# Altium PCB ST-Link Stlink v2_03_66x34mm.PcbDoc
Units mm, origin at the board's own origin, x right, y up, seen from the top; angles counter-clockwise.
Board outline 66.07 x 29.13 mm, 2 copper layers (Top Layer, Bottom Layer); 37 components, 28 nets, 138 pads, 37 vias.
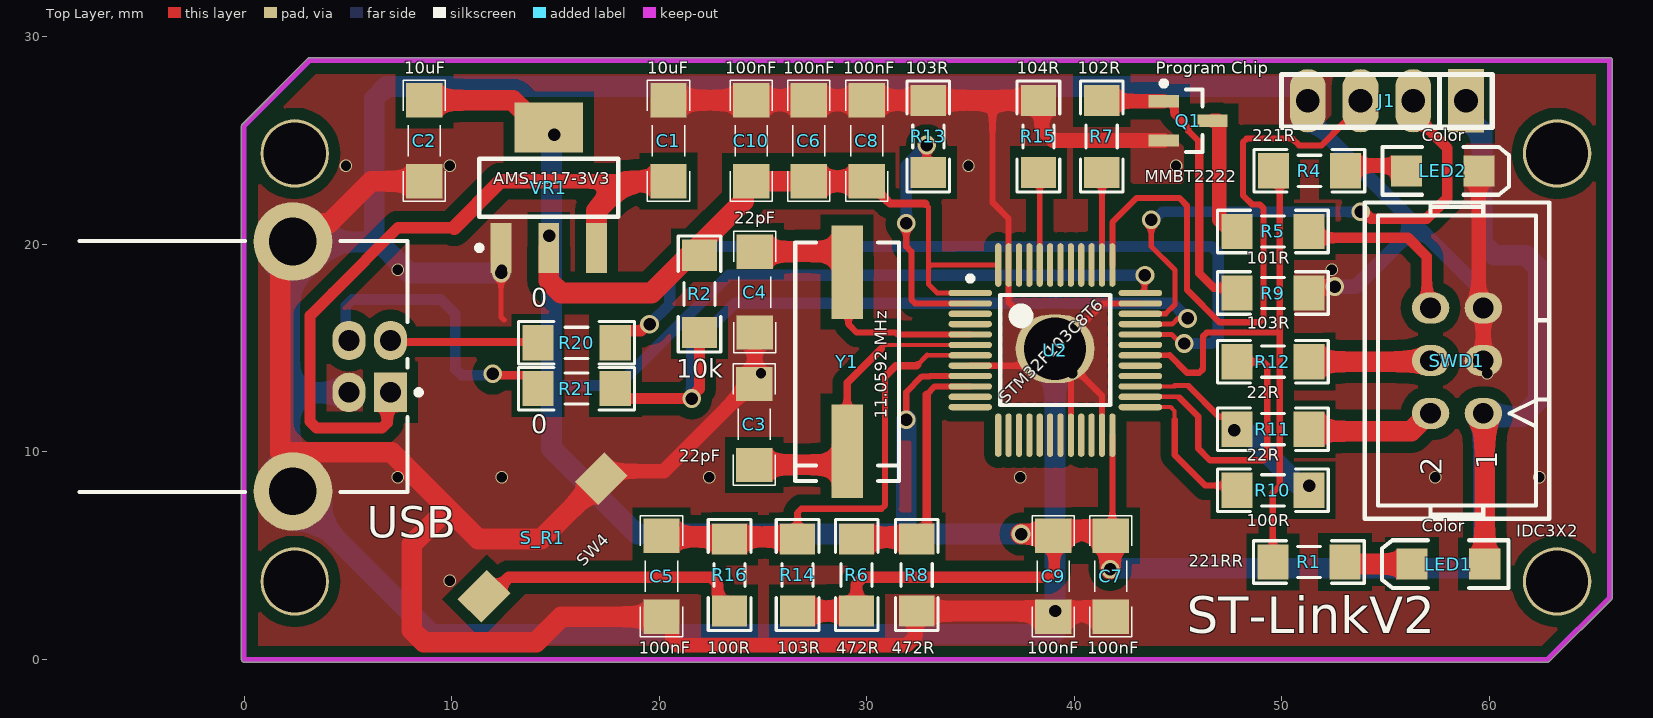
[diagram p0: Top Layer view]
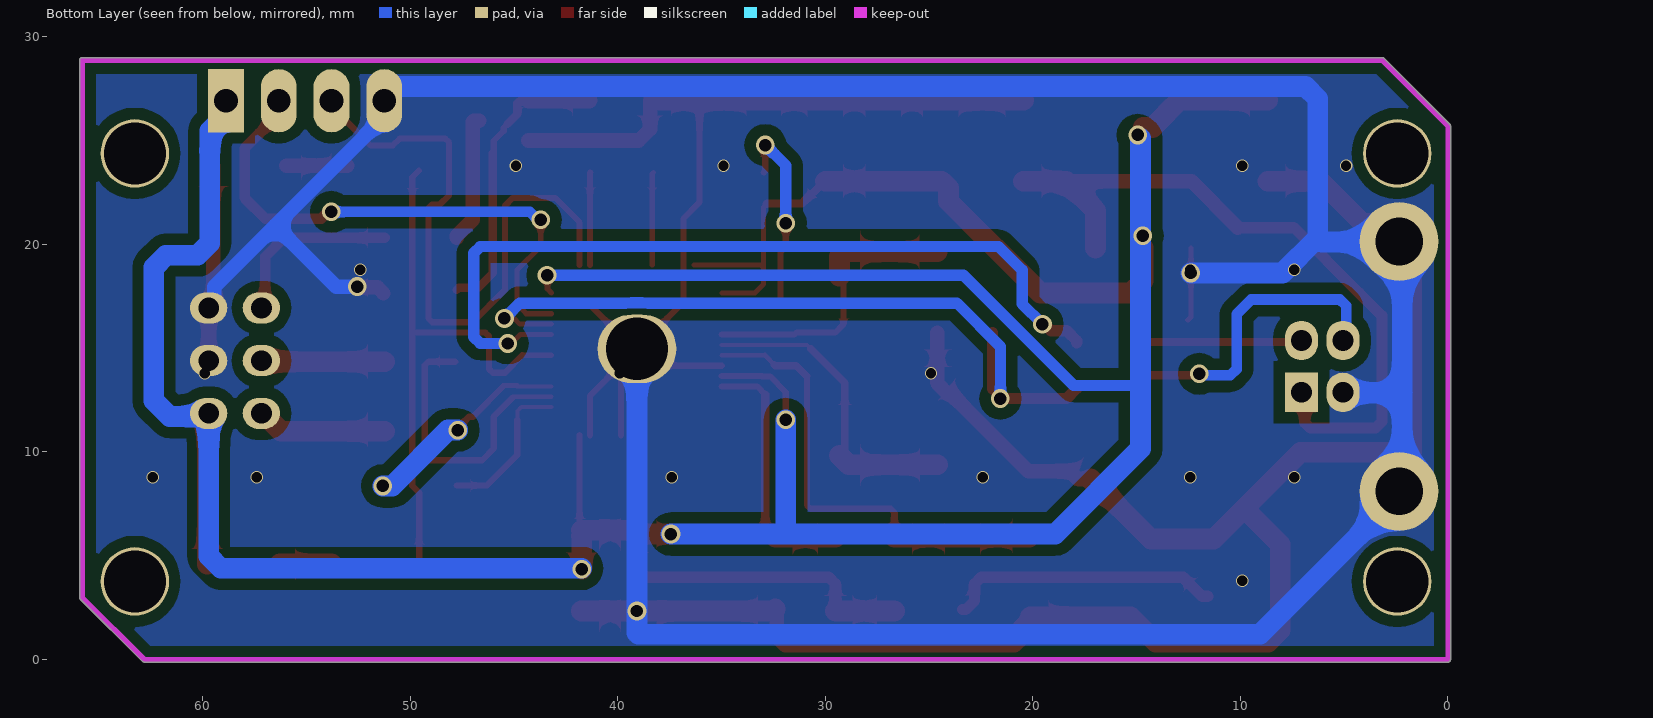
[diagram p1: Bottom Layer view, seen from below]
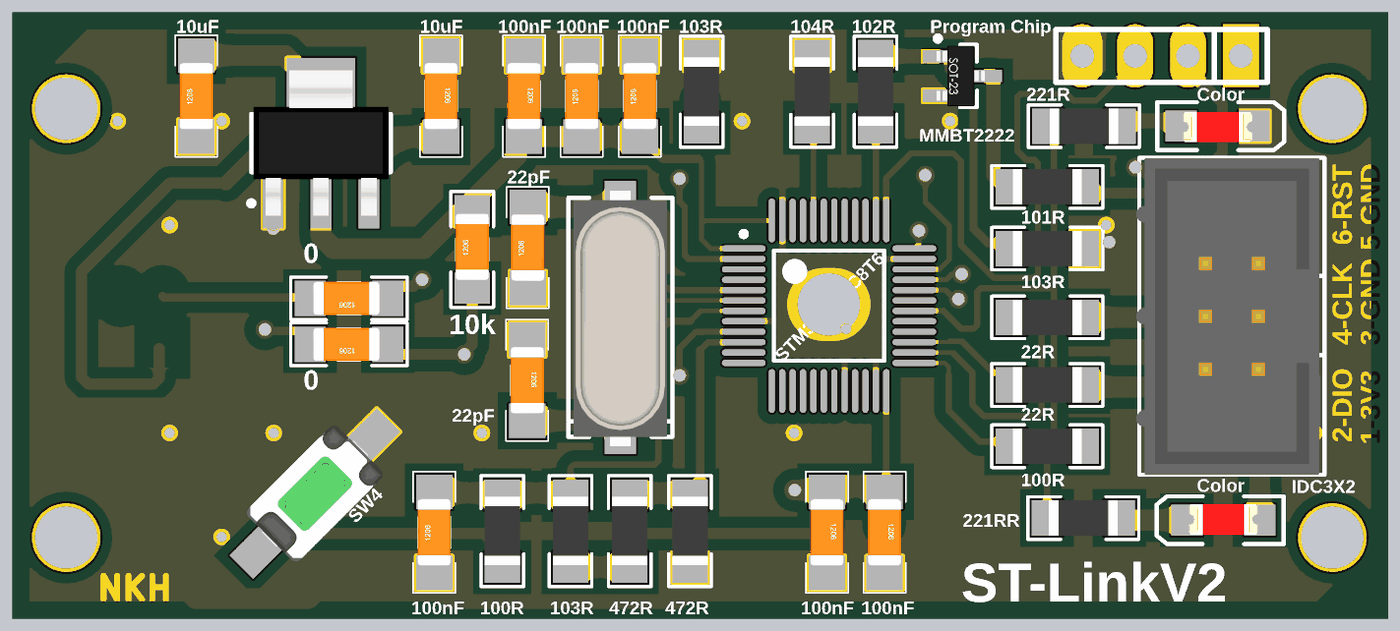
[diagram p2: 3D render of the assembled board from above, using the file's embedded part models]

## Layer stack, top to bottom
Top Solder: solder mask 0.0102, Solder Resist, Dk 3.5
Top Layer: signal copper 0.0356
Dielectric 1: dielectric 0.32, FR-4, Dk 4.8
Bottom Layer: signal copper 0.0356
Bottom Solder: solder mask 0.0102, Solder Resist, Dk 3.5

## Board outline
-0.127,0 -0.127,25.705 cw(c0,25.705) -0.09,25.795 3.085,28.97 3.084,28.969 cw(c3.175,28.88) 3.175,29.007 65.811,29.007 cw(c65.811,28.88) 65.939,28.88 65.939,2.997 cw(c65.811,2.997) 65.901,2.907 62.904,-0.09 62.905,-0.09 cw(c62.814,0) 62.814,-0.127 0,-0.127 cw(c0,0)

## Design rules (kind name [scope] priority, off if disabled: settings)
Clearance [All] p1: gap=0.54 ignorepadtopadclearanceinfootprint=FALSE except(0.2: Arc-Arc Arc-Track Arc-SMDPad Track-Track Track-SMDPad SMDPad-SMDPad SMDPad-THPad; 0.3: Arc-THPad Arc-Via Arc-Text Arc-Hole Track-THPad Track-Via Track-Text Track-Hole SMDPad-Via SMDPad-Text SMDPad-Hole THPad-THPad THPad-Via THPad-Text THPad-Hole Via-Via Via-Text Via-Hole; 0.7: Fill-Text Fill-Hole Poly-Text Poly-Hole Region-Text Region-Hole Text-Text Text-Hole)
PlaneConnect [All] p1: planeconnectstyle=Direct reliefexpansion=0.508 reliefentries=4 reliefconductorwidth=0.254 reliefairgap=0.254
PolygonConnect [All] p1: connectstyle=Direct reliefconductorwidth=0.254 reliefentries=4 polygonreliefangle="90 Angle" airgapwidth=0.254
RoutingVias [All] p1: holewidth=0.406 width=0.813 viastyle="Through Hole" minholewidth=0.406 minwidth=0.813 maxholewidth=0.406 maxwidth=0.813
SolderMaskExpansion [All] p1: expansion=0.102 istentingtop=FALSE
Width [All] p1: maxlimit=2.032 minlimit=0.025 preferedwidth=0.508
29 further rules are at their usual default settings.

## Components (designator, comment, footprint, x,y, rotation, side; value= is the part's Value field where it differs from the comment)
C1 "10uF" CAPC4817X12N 20.447,24.994 r270 top
C2 "10uF" CAPC4817X12N 8.687,24.994 r90 top
C3 "22pF" CAPC4817X12N 24.587,11.328 r270 top
C4 "22pF" CAPC4817X12N 24.613,17.704 r90 top
C5 "100nF" CAPC4817X12N 20.117,4.013 r90 top
C6 "100nF" CAPC4817X12N 27.203,24.994 r90 top
C7 "100nF" CAPC4817X12N 41.758,4.013 r270 top
C8 "100nF" CAPC4817X12N 29.997,24.994 r90 top
C9 "100nF" CAPC4817X12N 38.989,4.013 r270 top
C10 "100nF" CAPC4817X12N 24.435,24.994 r270 top
J1 "Program Chip" ZSIP04 58.877,26.924 r180 top
LED1 "Color" "LED SMD 1206" 58.034,4.597 r180 top
LED2 "Color" "LED SMD 1206" 57.76,23.546 r0 top
Q1 "MMBT2222" SOT23_BEC_M 45.491,25.959 r0 top
R1 "221RR" RES1206#1 51.308,4.699 r0 top
R2 "10k" RES1206#2 21.946,17.617 r270 top
R4 "221R" RES1206#1 51.333,23.546 r0 top
R5 "101R" RES1206#1 49.573,20.625 r0 top
R6 "472R" RES1206#1 29.515,4.072 r270 top
R7 "102R" RES1206#1 41.326,25.205 r90 top
R8 "472R" RES1206#1 32.41,4.072 r90 top
R9 "103R" RES1206#1 49.573,17.66 r180 top
R10 "100R" RES1206#1 49.573,8.153 r0 top
R11 "22R" RES1206#1 49.573,11.098 r0 top
R12 "22R" RES1206#1 49.573,14.351 r0 top
R13 "103R" RES1206#1 32.969,25.205 r90 top
R14 "103R" RES1206#1 26.67,4.072 r270 top
R15 "104R" RES1206#1 38.278,25.205 r270 top
R16 "100R" RES1206#1 23.393,4.072 r90 top
R20 "0" RES1206#2 16.026,15.262 r0 top value=0-ohm
R21 "0" RES1206#2 16.026,13.054 r0 top value=0-ohm
S_R1 "SW4" SMD_ALPS_NEW 14.389,5.875 r225 top
SWD1 "IDC3X2" IDC_2X3 58.445,14.402 r90 top
U2 "STM32F103C8T6" LQFP48_M 39.091,14.91 r0 top
USB "USB Connector" USB2.5-2H4F -7.95,14.122 r180 top
VR1 "AMS1117-3V3" MP04A_N 14.681,22.733 r90 top
Y1 "11.0592 MHz" "Crystal SMD" 29.062,14.351 r90 top

## Footprints (in the part's own frame and the unit in brackets; to place one, negate y for a bottom-side part, rotate by r counter-clockwise, add the part's x,y. Pads: shape width x height; smd on the part's side, far side on the other; paste and mask are expansions set on the pad)
CAPC4817X12N [mm]
  rect 1.65x1.75 smd: 1(-1.95,0) 2(1.95,0)
  silkscreen extent -2.92,-1.02 2.92,1.02, body extent -1.6,-0.8 1.6,0.8, height 1
"Crystal SMD" [mm]
  rect 4.5x1.5 smd: 1(-4.318,0) 2(4.318,0)
  silkscreen extent -5.75,-2.5 5.75,2.5, body extent -6.21,-2.25 6.09,2.25, height 5.18
IDC_2X3 [mm]
  oval 1.5x1.8 hole 1 mask+0.1: 1(-2.54,-1.27) 2(-2.54,1.27) 3(0,-1.27) 4(0,1.27) 5(2.54,-1.27) 6(2.54,1.27)
  silkscreen extent -7.62,-4.45 7.62,4.44, body extent -7.61,-4.25 7.61,4.6, height 9.17
"LED SMD 1206" [mm]
  rect 1.5x1.5 smd: 1(-1.75,0) 2(1.75,0)
  silkscreen extent -2.9,-1.15 3.2,1.15, body extent -1.65,-0.76 1.65,0.69, height 1.36
LQFP48_M [mm] "Thin QFP, 48-Leads, Body 7x7mm, Pitch 0.5mm, IPC Low Density"
  oval 2.1x0.3 smd: 1(-4.1,2.75) 2(-4.1,2.25) 3(-4.1,1.75) 4(-4.1,1.25) 5(-4.1,0.75) 6(-4.1,0.25) 7(-4.1,-0.25) 8(-4.1,-0.75) 9(-4.1,-1.25) 10(-4.1,-1.75) 11(-4.1,-2.25) 12(-4.1,-2.75) 25(4.1,-2.75) 26(4.1,-2.25) 27(4.1,-1.75) 28(4.1,-1.25) 29(4.1,-0.75) 30(4.1,-0.25) 31(4.1,0.25) 32(4.1,0.75) 33(4.1,1.25) 34(4.1,1.75) 35(4.1,2.25) 36(4.1,2.75)
  oval 0.3x2.1 smd: 13(-2.75,-4.1) 14(-2.25,-4.1) 15(-1.75,-4.1) 16(-1.25,-4.1) 17(-0.75,-4.1) 18(-0.25,-4.1) 19(0.25,-4.1) 20(0.75,-4.1) 21(1.25,-4.1) 22(1.75,-4.1) 23(2.25,-4.1) 24(2.75,-4.1) 37(2.75,4.1) 38(2.25,4.1) 39(1.75,4.1) 40(1.25,4.1) 41(0.75,4.1) 42(0.25,4.1) 43(-0.25,4.1) 44(-0.75,4.1) 45(-1.25,4.1) 46(-1.75,4.1) 47(-2.25,4.1) 48(-2.75,4.1)
  silkscreen extent -4.22,-2.65 2.65,3.57, body extent -3.5,-3.5 3.5,3.5, height 1.6
MP04A_N [mm] "SOT223, 4-Leads, Body 6.5x3.5mm, Pitch 2.3mm, Lead Span 7mm, IPC Medium Density"
  rect 2.4x1 smd: 1(-2.9,2.3) 2(-2.9,0) 3(-2.9,-2.3)
  rect 2.4x3.3 smd: 4(2.9,0)
  silkscreen extent -3.02,-3.35 1.4,3.47, body extent -3.49,-3.24 3.49,3.24, height 1.64
RES1206#1 [mm]
  rect 1.5x1.7 smd: 1(-1.735,0) 2(1.735,0)
  silkscreen extent -2.67,-1.02 2.67,1.03, body extent -1.65,-0.85 1.65,0.85, height 0.94
RES1206#2 [mm]
  rect 1.5x1.7 smd: 1(-1.862,0) 2(1.862,0)
  silkscreen extent -2.79,-1.02 2.79,1.02, body extent -1.72,-0.8 1.48,0.8, height 1
SMD_ALPS_NEW [mm]
  rect 2x1.6 smd: 1(-4,0) 2(4,0)
  body extent -3.15,-1.75 3.15,1.75, height 5.03
SOT23_BEC_M [mm] "SOT23, 3-Leads, Body 2.9x1.3mm, Pitch 0.95mm, Lead Span 2.4mm, IPC Low Density"
  rect 1.45x0.6 smd: 1(-1.175,0.95) 2(-1.175,-0.95) 3(1.175,0)
  silkscreen extent -1.3,-1.5 0.7,1.92, body extent -1.23,-1.45 1.07,1.45, height 1
USB2.5-2H4F [mm] "Connector; USB1.1, Type B, Thru-Hole; 4 Position; Right Angle"
  rect 1.6x1.9 hole 1: 1(-15.01,1.25)
  oval 1.6x1.9 hole 1: 2(-15.01,-1.25) 3(-13.01,-1.25) 4(-13.01,1.25)
  round 3.8 hole 2.3: 5(-10.3,6.02) 6(-10.3,-6.02)
  silkscreen extent -16.49,-6.05 -0.02,6.05, body extent -16.51,-7.45 -0.01,7.45, height 10.95
ZSIP04 [mil]
  rect 68x120 hole 45: 1(0,0)
  oval 68x120 hole 45: 2(100,0) 3(200,0) 4(300,0)
  silkscreen extent -50,-50 350,50

## Part data
C1 C2 C3 C4 C5 C6 C7 C8 C9 C10: library part "CAP SMD 1206", "CAP 1206", Data=16-12-2016, Desc.="CAP SMD 1206", Designer="Abbas Basereh"
J1: library part ZCON4, "Connector"
LED1 LED2: library part LED, "Infra Red Reciever Photo Diode", Adding Date=1387/12/22, Designer="Saeid Jorablo", Organazation=ControTec
R1 R4 R5 R6 R7 R8 R9 R10 R11 R12 R13 R14 R15 R16: library part res
R2: library part resistor-smd-1206-10k, case=1206, manufacture="ANHUI VICO TECHNOLOGIES CO.", manufacture p-n="10K (1206) 1%", Designer=rashid_behdarvand, Footprint Patch=R_C_D_T.PcbLib, LIBRARY PATCH=R_C_D_T.SchLib, part=resistor-smd-1206-10k, Rahkaran=1012000582, supplier1=javan, supplier1 p-n="10K (1206) 1%"
R20 R21: library part resistor-smd-1206-0-ohm, case=1206, manufacture=ITEX, manufacture p-n=1206W4J0000IT5, Designer=rashid_behdarvand, Footprint Patch=R_C_D_T.PcbLib, LIBRARY PATCH=R_C_D_T.SchLib, part=resistor-smd-1206-0-ohm, Rahkaran=‎1012000047, supplier1=javan, supplier1 p-n="0 (1206)"
S_R1: library part SW_PB2, "2 Pin Push Button Switch", Category=MISC, Company="SJ Libraries", ComponentLink1Description=Datasheet, Designer="Eng. Saeid Jorablo", HelpURL=http://s3.picofile.com/file/7443264187/Coming_Soon_logo.gif, Mounting Technology="Surface Mount\Through-Hole", Pin Count=0, Update Date=6/3/2012
SWD1: library part "IDC 3X2", "IDC, 6-Pin, Dual row", LatestRevisionDate=17-Jul-2002, LatestRevisionNote="Re-released for DXP Platform.", Publisher="Altium Limited"
U2: "STM32 ARM-based 32-bit MCU with 64 Kbytes Flash, 48-pin LQFP, Industrial Temperature", ComponentLink1Description="Manufacturer Link", ComponentLink1URL=www.st.com/stm32, ComponentLink2Description=Datasheet, ComponentLink2URL=http://www.st.com/stonline/products/literature/ds/13587.pdf, DatasheetVersion="rev6, Mar-2008", PackageDescription="48-Pin Low-Profile Quad Flat Pack, 7 x 7 mm Body, 0.5 mm Pitch (LQFP48)", PackageReference=LQFP48, PackageVersion=Mar-2008, Published=30-May-2008, Publisher="Altium Limited"
USB: library part USB, "USB Connector-B Type", Adding Date=10/26/2010, Company="DASE Co", Designer="Eng. Saeid Jorablo"
VR1: library part LM1117IMP-x.x, "x.x Volt, 800mA Low-Dropout Linear Regulator, 4-pin SOT-223", Manufacturer="National Semiconductor", PackageTopMarking=XYTT*N05B, PartNumber=LM1117IMP-3.3, PowerWise=N, Supplier Part Number 1=7614123, Code_IPC=SOT223-4, Code_JEDEC=TO-261-AA, ComponentLink1Description="LM1117 Datasheet", ComponentLink1URL=http://www.national.com/ds/LM/LM1117.pdf, ComponentLink2Description="LM1117 Web Page", ComponentLink2URL=http://www.national.com/pf/LM/LM1117.html, ComponentLink3Description="MP04A Package Page", ComponentLink3URL=http://www.national.com/packaging/folders/mp04a.html, CompType="LDO IC", DatasheetVersion=Apr-2006, PackageDescription="Molded SOT-223, 6.50 x 3.56 x 1.6mm Body, 4 Lead, 2.3mm Pitch", PackageReference=MP04A, PackageVersion="revB, Apr-2003", PinCount=4, Published=4-Dec-2008, Publisher="Altium Limited", RoHS=N, Supplier 1=Farnell
Y1: library part XTAL, "XTAL Crystal", Company=E.P.I.L, Design Date=11/04/2011

## Free pads (board coordinates)
  round 3.3 hole 3: 6(63.271,3.759) 7(2.438,24.384) 8(2.438,3.759) 9(63.271,24.384)
  oval 3.8x3.3 hole 3: 9(39.079,14.97)

## Via types
v1: diameter 0.9, hole 0.6, Top Layer to Bottom Layer, tented both sides, 20 vias
v2: diameter 0.6/0.6 (per signal layer), hole 0.5, Top Layer to Bottom Layer, 17 vias

## Nets (pads, with @x,y where several pads share a name; then routed paths per layer and width w, separated by ;. In a path a pad name is that pad's centre, name@x,y a point inside that pad or via, vN(x,y) a via of type N, cw(c..) or ccw(c..) an arc to the next point about the centre after c; other vN are vias at no path point)
3V3: C2.2 C6.1 C7.1 C8.1 C9.1 C10.2 J1.1 LED1.1 R2.1 R6.2 R14.2 SWD1.1 U2.1 U2.9 U2.24 U2.36 U2.48 VR1.2 VR1.4 | length 198.5
  Top Layer w0.24: 32.829,21.958 32.969,21.817 32.969,18.869 ; 34.275,19.01 33.11,19.01 32.969,18.869 ; 34.305,19.01 U2.48 ; U2.1 33.4,17.66 32.969,18.091 32.969,18.869
  Top Layer w0.254: U2.36 43.394,17.864 43.394,18.502 v1(43.409,18.517)
  Top Layer w0.3: v1(31.909,11.557) 31.905,11.561 31.905,12.88 32.665,13.64 33.043,13.64 33.063,13.66 U2.9 ; C7.1 41.841,6.046 U2.24
  Top Layer w0.4: C8.1 30.047,23.044 31.12,21.971 32.815,21.971 32.829,21.958
  Top Layer w0.54: R6.2 29.515,3.646 29.831,3.962 38.722,3.962 39.038,4.279 39.038,5.914 C9.1
  Top Layer w1: C2.2 12.945,26.944 13.531,26.358 13.531,26.333 14.231,25.633 VR1.4 ; VR1.2 14.681,18.246 15.267,17.66 19.637,17.66 24.06,22.083 24.06,22.719 24.385,23.044 C6.1 C8.1 ; R14.2 R6.2 ; v1(37.44,6.045) 38.907,6.045 C9.1 ; C9.1@38.989,6.233 C7.1@41.758,6.233 ; v1(41.732,4.343) 41.732,5.938 C7.1 ; SWD1.1 59.784,11.793 LED1.1
  Bottom Layer w0.54: 14.808,13.208 18.028,13.208 23.336,18.517 v1(43.409,18.517)
  Bottom Layer w1: v1@14.808,25.121 14.808,20.422 14.808,13.208 14.808,10.16 18.923,6.045 32.207,6.045 ; v1(31.909,11.557) 31.909,6.343 32.207,6.045 ; v1(37.44,6.045) 32.207,6.045 ; v1@41.732,4.394 59.13,4.394 59.715,4.98 SWD1.1 ; J1.1 58.877,26.264 59.665,25.476 59.665,20.068 60.25,19.482 61.771,19.482 62.357,18.896 62.357,12.471 61.595,11.709 SWD1.1@60.371,11.709
  other v1: 14.707,20.422 14.949,25.278
5V: C1.2 USB.1 VR1.3 | length 34.3
  Top Layer w0.54: USB.1@6.907,12.847 6.896,12.836 6.896,11.403 6.643,11.151 3.491,11.151 3.175,11.467 3.175,16.561 4.274,17.66 7.423,20.808 10.117,20.808
  Top Layer w0.7: 10.117,20.808 12.352,23.044 18.395,23.044
  Top Layer w1: VR1.3 16.981,21.629 18.395,23.044 C1.2
BOOT0: R15.2 U2.44 | length 4.5
  Top Layer w0.25: R15.2 38.341,23.407 U2.44
GND: C1.1 C2.1 C3.1 C4.1 C5.1 C6.2 C7.2 C8.2 C9.2 C10.1 J1.4 LED2.2 pad.9@39.079,14.97 Q1.2 R8.1 R9.1 R13.2 R15.1 S_R1.1 SWD1.3 SWD1.5 U2.8 U2.20 U2.23 U2.35 U2.47 USB.4 USB.5 USB.6 VR1.1 | length 312.4
  Top Layer w0.254: VR1.1 12.381,16.505 12.53,16.356
  Top Layer w0.3: U2.8 39.079,14.16 39.841,13.398 U2.20 ; 36.068,26.944 36.068,22.022 36.841,21.249 U2.47 36.841,17.208 39.079,14.97 pad.9@39.841,14.208 ; U2.23 41.341,12.708 pad.9@39.841,14.208 ; U2.35 41.414,17.16 39.841,15.586 pad.9@39.841,14.208
  Top Layer w0.7: S_R1.1 17.853,8.704 18.223,9.074 20.219,9.074 23.949,12.803 24.112,12.803 C3.1 ; C5.1 20.167,2.063 20.642,1.588 20.642,0.912 20.876,0.677 31.934,0.677 32.344,1.087 32.344,2.27 R8.1 ; C3.1@24.613,13.354 C4.1 ; R15.1 38.448,26.769 38.448,25.55 38.989,25.009 Q1.2 ; R9.1 51.581,17.932 52.514,17.932 v1(52.553,17.971) ; LED2.2@59.484,23.8 59.484,17.173 SWD1.5 SWD1.3
  Top Layer w1: C2.1 6.124,23.044 4.102,21.021 3.859,21.021 2.433,19.595 2.433,19.581 1.742,18.89 1.742,9.99 7.104,9.99 11.287,5.807 14.32,5.807 S_R1.1 ; 9.721,7.181 8.077,5.537 8.077,1.413 8.663,0.827 14.06,0.827 15.297,2.063 C5.1 ; C1.1 C10.1 C6.2 C8.2 36.068,26.944 38.274,26.944 R15.1 ; R8.1@32.41,2.438 32.516,2.333 38.989,2.333 C7.2@41.758,2.333
  Bottom Layer w0.7: J1.4 51.257,26.162 56.512,20.907 ; v1(52.553,17.971) 53.576,17.971 56.512,20.907 ; SWD1.5 59.449,17.209 59.449,17.971 56.512,20.907
  Bottom Layer w1: USB.4@4.907,12.847 2.197,12.847 ; v1(12.384,18.623) 7.97,18.623 6.274,20.32 ; pad.9@39.079,14.97 v1(39.079,2.337) 39.079,1.283 39.014,1.219 9.055,1.219 2.197,8.077 2.197,12.847 ; J1.4 51.257,27.274 50.921,27.61 6.86,27.61 6.274,27.024 6.274,20.32 ; 2.197,12.847 2.197,20.117 6.071,20.117 6.274,20.32
  other v2: 9.908,3.79 7.408,8.79 12.408,8.79 22.408,8.79 37.408,8.79 57.408,8.79 62.408,8.79 24.908,13.79 39.908,13.79 59.908,13.79 7.408,18.79 12.408,18.79 52.408,18.79 4.908,23.79 9.908,23.79 34.908,23.79 44.908,23.79
LED_STLINK: R1.1 R4.1 U2.30 | length 27.9
  Top Layer w0.254: U2.30 44.597,14.66
  Top Layer w0.305: 44.597,14.66 45.436,13.821 46.03,13.821 46.208,14 46.208,15.575 46.387,15.754 49.792,15.754 49.902,15.863 ; R1.1 49.573,8.044 49.902,8.373 49.902,15.754 49.902,15.863 ; R4.1 49.902,23.242 49.902,15.863
NetLED1_2: LED1.2 R1.2 | length 2.5
  Top Layer w1: 53.797,4.597 LED1.2
NetLED2_1: LED2.1 R4.2 | length 2.9
  Top Layer w0.7: R4.2@53.043,23.8 LED2.1@55.984,23.8
NetQ1_1: Q1.1 R7.2 R9.2 | length 14.4
  Top Layer w0.3: 45.316,25.803 45.491,25.627 45.491,25.472 45.974,24.99 45.974,24.409 46.03,24.409
  Top Layer w0.4: Q1.1 44.741,26.909 44.841,26.809 44.841,26.277 45.316,25.803 ; 46.03,24.409 46.03,18.608 46.722,17.915 47.66,17.915 R9.2@47.77,17.805
  Top Layer w0.7: R7.2 41.357,26.909 Q1.1
NetQ1_3: Q1.3 R5.1 | length 6.3
  Top Layer w0.7: Q1.3 46.941,25.959 46.991,25.909 46.991,21.198 47.77,20.42 R5.1@47.77,20.32
NetR13_1: R13.1 U2.2 | length 12.2
  Top Layer w0.3: v1(31.905,21.021) 31.905,19.905 32.156,19.654 32.156,17.336 32.332,17.16 U2.2 ; v1(32.893,24.79) 32.893,23.546 R13.1
  Bottom Layer w0.54: v1(31.905,21.021) 31.905,23.802 v1(32.893,24.79)
NetR16_1: R16.1 S_R1.2 | length 13.3
  Top Layer w0.54: S_R1.2 11.841,3.047 12.757,3.962 22.497,3.962 22.813,3.646 22.813,2.817 23.225,2.405 R16.1@23.393,2.405
OSC_IN: C4.2 U2.5 Y1.2 | length 14.4
  Top Layer w0.3: Y1.2 29.124,18.607 29.124,16.145 29.515,15.754 31.394,15.754 31.488,15.66 U2.5
  Top Layer w1: C4.2 29.062,19.654 29.312,19.404 Y1.2@29.312,18.466
OSC_OUT: C3.2 U2.6 Y1.1 | length 14.9
  Top Layer w0.2: 30.699,14.97 30.889,15.16 U2.6
  Top Layer w0.35: Y1.1 29.062,13.332 30.699,14.97
  Top Layer w1: C3.2 28.86,9.378 Y1.1@29.312,9.83
PA0: R6.1 R8.2 U2.10 | length 12.3
  Top Layer w0.3: 32.893,12.767 33.286,13.16 U2.10
  Top Layer w0.4: R8.2 32.893,6.289 32.893,12.767
  Top Layer w1: R6.1@29.515,5.901 R8.2@32.403,5.901
PA11: R20.2 U2.32 | length 40.2
  Top Layer w0.24: U2.32 44.695,15.66 45.127,15.227 v1(45.306,15.227)
  Top Layer w0.54: R20.2 17.888,15.362 18.368,15.842 19.122,15.842 19.44,16.16 v1(19.537,16.16)
  Bottom Layer w0.54: v1(19.537,16.16) 20.516,17.138 20.516,18.763 21.658,19.905 46.625,19.905 46.941,19.589 46.941,15.544 46.625,15.227 v1(45.306,15.227)
PA12: R2.2 R21.2 U2.33 | length 37.2
  Top Layer w0.24: U2.33 44.721,16.16 45.001,16.44 45.18,16.44 45.195,16.424 45.204,16.434 v1(45.462,16.434)
  Top Layer w0.54: R21.2@17.888,13.053 18.368,12.573 v1(21.565,12.573) 21.565,12.67 21.946,13.051 R2.2
  Bottom Layer w0.54: v1(21.565,12.573) 21.565,15.072 23.663,17.17 38.532,17.17 cw(c38.829,14.97) 38.829,17.19 39.329,17.19 cw(c39.329,14.97) 39.625,17.17 44.725,17.17 v1(45.462,16.434)
PA13: J1.2 U2.34 | length 26.8
  Top Layer w0.254: U2.34 44.38,16.66 44.383,16.662 44.409,16.662 44.855,17.109 44.855,18.762 43.713,19.904 v1(43.713,21.188)
  Top Layer w0.508: v1@53.797,21.749 54.297,21.249 56.996,21.249 57.988,22.241 57.988,24.638 56.337,26.289 J1.2
  Bottom Layer w0.508: v1(43.713,21.188) 43.87,21.188 44.252,21.57 v1(53.811,21.57)
PA14: J1.3 U2.37 | length 30.8
  Top Layer w0.3: U2.37 41.841,21.063 43.018,22.241 45.06,22.241 45.436,21.865 45.436,17.818 46.998,16.256 48.942,16.256 49.126,16.44 49.126,21.749 48.95,21.925 48.57,21.925 48.133,22.362 48.133,24.919 48.313,25.1 50.509,25.1 50.835,24.774 51.922,24.774 52.975,25.828 53.797,26.65 J1.3
PB12: R10.1 U2.25 | length 7.4
  Top Layer w0.2: U2.25 44.654,12.16 44.841,11.972 44.841,11.557
  Top Layer w0.305: 44.841,11.557 44.841,9.853 46.312,8.382 R10.1@47.77,8.382
PB13: R12.1 U2.26 | length 14.3
  Top Layer w0.2: U2.26 45.024,12.66 45.06,12.624
  Top Layer w0.3: 45.06,12.624 45.974,11.709 45.974,10.168 46.541,9.601 49.126,9.601 49.301,9.777 49.301,14.175 49.126,14.351 R12.1
PB14: R10.2 R11.1 U2.27 | length 10.3
  Top Layer w0.2: U2.27 44.814,13.16 44.841,13.187
  Top Layer w0.254: 44.841,13.187 44.855,13.201 45.475,13.201 45.516,13.16
  Top Layer w0.305: 45.516,13.16 46.98,11.696 47.172,11.696 47.77,11.098 R11.1@47.77,10.998
  Bottom Layer w1: v1(47.715,11.054) 48.179,11.054 50.871,8.362 v1(51.322,8.362)
PB15: R7.1 U2.38 | length 4.5
  Top Layer w0.3: R7.1 41.341,23.455 U2.38
RESET: C5.2 R14.1 R16.2 U2.7 | length 22.9
  Top Layer w0.2: 32.912,14.66 U2.7
  Top Layer w0.25: 32.46,14.207 32.912,14.66
  Top Layer w0.3: R14.1 26.67,5.908 26.67,7.089 26.846,7.265 30.713,7.265 30.889,7.44 30.889,13.64
  Top Layer w0.36: 30.889,13.64 31.409,14.16 32.412,14.16 32.46,14.207
  Top Layer w1: C5.2 20.172,5.908 23.393,5.908 R14.1@26.67,5.908
"RESET Micro": R5.2 SWD1.6 | length 8.7
  Top Layer w0.508: R5.2@51.24,20.32 56.084,20.32 56.996,19.408 56.996,17.121 SWD1.6
TCK(SWCLK): R12.2 SWD1.4 | length 6
  Top Layer w0.508: SWD1.4@57.125,14.351 SWD1.4
  Top Layer w1: R12.2@51.24,14.351 SWD1.4@57.125,14.351
TMS(SWDIO): R11.2 SWD1.2 | length 6.3
  Top Layer w1: R11.2@51.24,10.998 56.232,10.998 57.095,11.862 SWD1.2
USB_DM: R20.1 USB.2 | length 7.4
  Top Layer w0.4: USB.2 7.129,15.303 R20.1@14.389,15.303
USB_DP: R21.1 USB.3 | length 14.4
  Top Layer w0.4: v1@12.017,13.703 R21.1@14.389,13.703
  Bottom Layer w0.508: USB.3@4.907,15.347 4.907,17.051 5.205,17.348 9.474,17.348 10.185,16.637 10.185,13.988 10.483,13.691 11.635,13.691 11.637,13.692 11.914,13.692 v1(11.989,13.767)
pads on no net: U2.3 U2.4 U2.11 U2.12 U2.13 U2.14 U2.15 U2.16 U2.17 U2.18 U2.19 U2.21 U2.22 U2.28 U2.29 U2.31 U2.39 U2.40 U2.41 U2.42 U2.43 U2.45 U2.46

## Polygon pours and split planes (outlines as drawn)
GND on Bottom Layer "GND_L02_P001" (solid, pour order 1): -0.127,0 -0.127,25.705 cw(c0,25.705) -0.09,25.795 3.085,28.97 3.084,28.969 cw(c3.175,28.88) 3.175,29.007 65.811,29.007 cw(c65.811,28.88) 65.939,28.88 65.939,2.997 cw(c65.811,2.997) 65.901,2.907 62.904,-0.09 62.905,-0.09 cw(c62.814,0) 62.814,-0.127 0,-0.127 cw(c0,0)
GND on Top Layer "GND_L01_P000" (solid, pour order 0): -0.127,0 -0.127,25.705 cw(c0,25.705) -0.09,25.795 3.085,28.97 3.084,28.969 cw(c3.175,28.88) 3.175,29.007 65.811,29.007 cw(c65.811,28.88) 65.939,28.88 65.939,2.997 cw(c65.811,2.997) 65.901,2.907 62.904,-0.09 62.905,-0.09 cw(c62.814,0) 62.814,-0.127 0,-0.127 cw(c0,0)

## Keep-outs
Keep-Out Layer:
  lines w0.254: 0,0 62.814,0 ; 0,0 0,25.705 3.175,28.88 65.811,28.88 65.811,2.997 62.814,0 ; 0,0 62.814,0

## Silkscreen, mask and mechanical layers (free items; w line width, h text height)
Top Overlay:
  text "ST-LinkV2" at 45.436,0.677 h3
Top Solder:
  text "6-RST" at 64.211,17.831 h1.52 r90
  text "5-GND" at 65.557,17.577 h1.52 r90
  text "4-CLK" at 64.211,13.03 h1.52 r90
  text "3-GND" at 65.557,13.005 h1.52 r90
  text "2-DIO" at 64.211,8.331 h1.52 r90
  text "1-3V3" at 65.557,8.23 h1.52 r90
  text "NKH" at 3.759,0.762 h1.14
  text "ST-LinkV2" at 45.436,0.677 h3

## Text inside footprints (layer, text, board x,y; h text height)
SWD1: Top Overlay "2" at 57.709,8.89 h1 r90; Top Overlay "1" at 60.376,9.169 h1 r90
USB: Mechanical 1 "PCB Edge" at -7.625,19.774 h0.25 r270